# Altium PCB tinyfpga-raspi-romi-board.PcbDoc
Units mm, origin at the board's own origin, x right, y up, seen from the top; angles counter-clockwise.
Board outline 152.4 x 101.6 mm, 2 copper layers (F.Cu, B.Cu); 75 components, 75 nets, 287 pads, 4 vias.
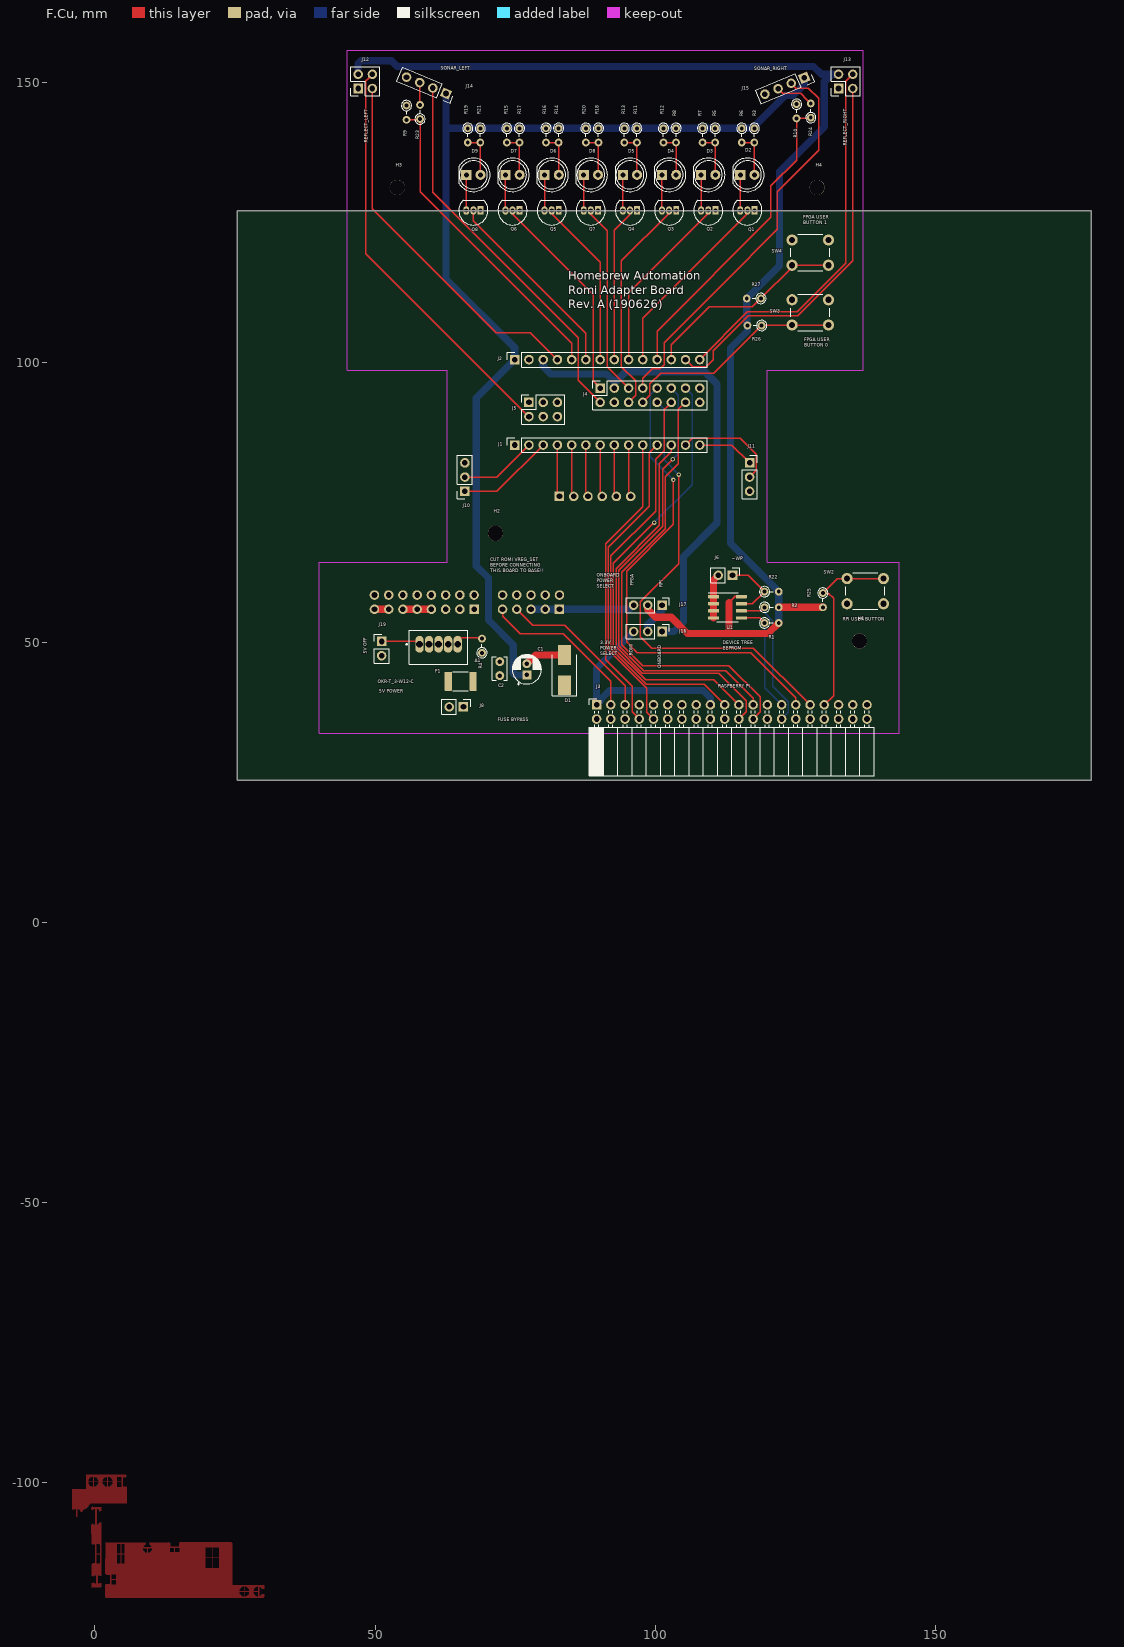
[diagram p0: F.Cu view]
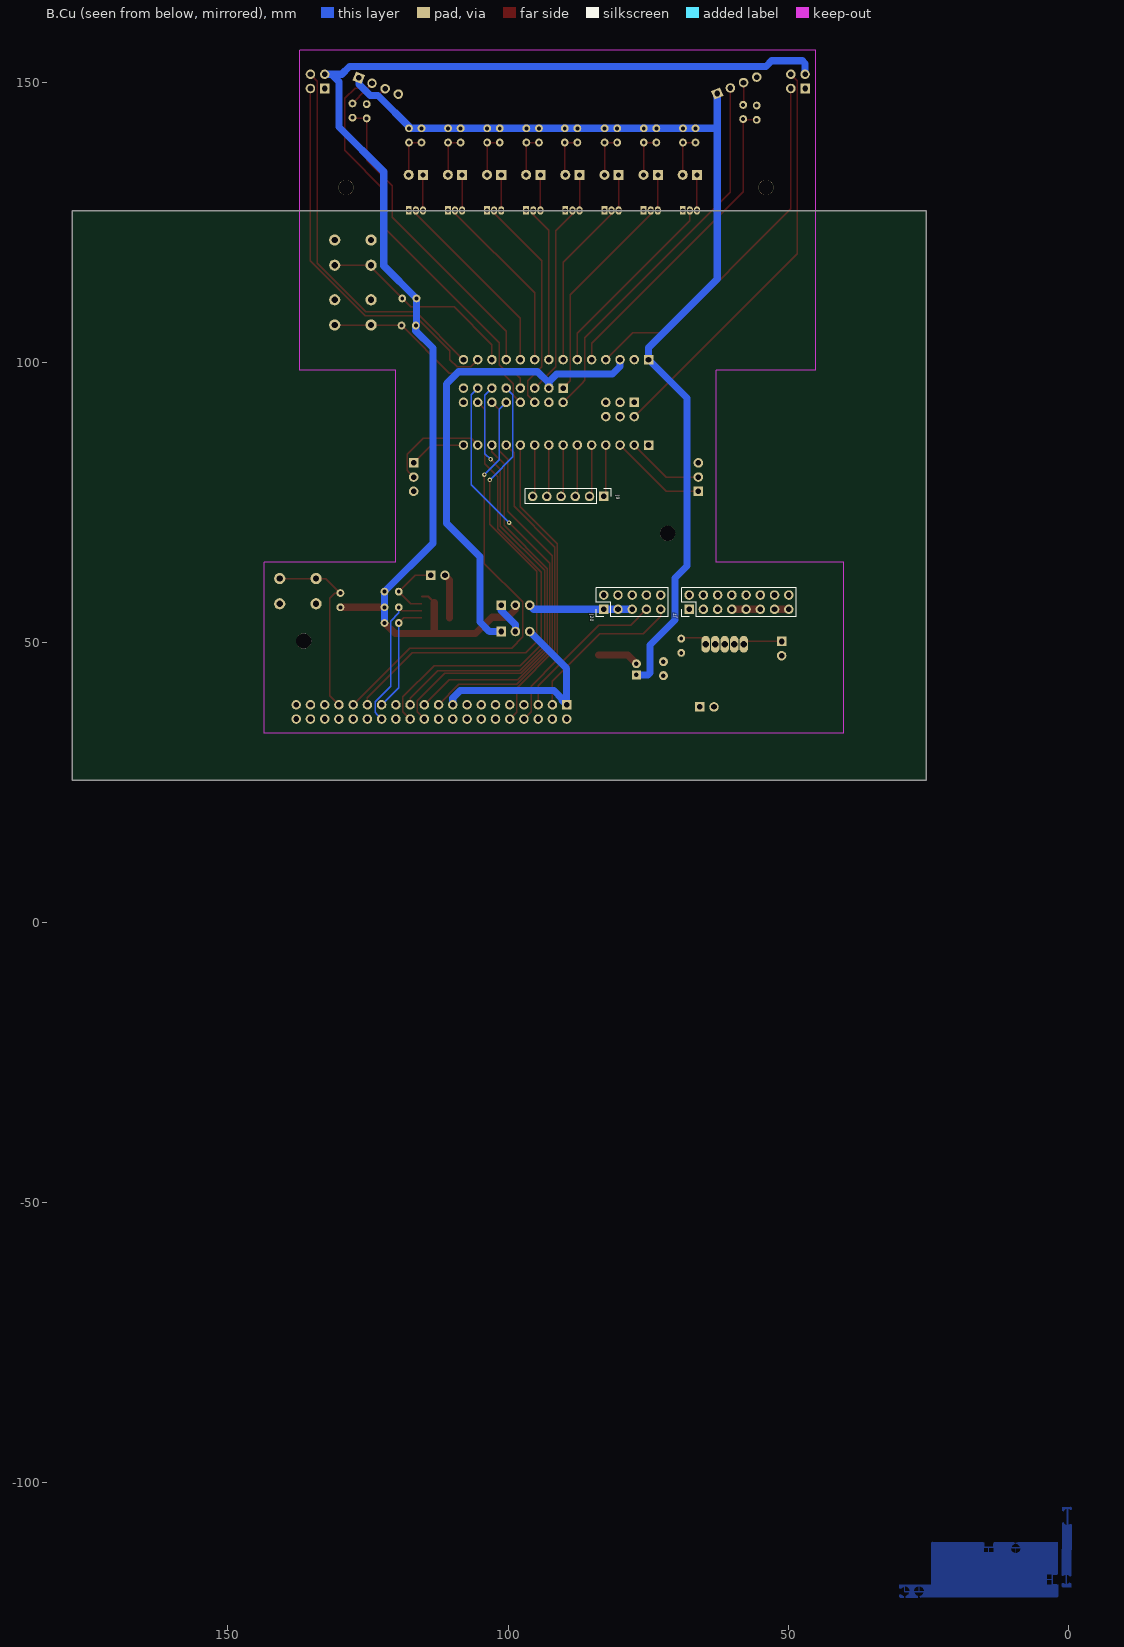
[diagram p1: B.Cu view, seen from below]

## Layer stack, top to bottom
F.Mask: solder mask 0.0102, Solder Resist, Dk 3.5
F.Cu: signal copper 0.0356
Dielectric 1: dielectric 0.32, FR-4, Dk 4.8
B.Cu: signal copper 0.0356
B.Mask: solder mask 0.0102, Solder Resist, Dk 3.5

## Board outline
25.4,25.4 177.8,25.4 177.8,127 25.4,127

## Design rules (kind name [scope] priority, off if disabled: settings)
RoutingVias [All] p1: holewidth=0.711 width=1.27 viastyle="Through Hole" minholewidth=0.711 minwidth=1.27 maxholewidth=0.711 maxwidth=1.27
SolderMaskExpansion [All] p1: expansion=0.102 istentingtop=FALSE
29 further rules are at their usual default settings.

## Classes and differential pairs
net class Power: +3V3 +5V +BATT FPGA_3.3V_OUT GND Net-(J16-Pad2) ROMI_3V3 RPI_3.3V_OUT VB VREG_OUT VRP
net class Default: FPGA_BTN0 FPGA_BTN1 FPGA_HBA_INT FPGA_LED0 FPGA_LED1 FPGA_LED2 FPGA_LED3 FPGA_LED4 FPGA_LED5 FPGA_LED6 FPGA_LED7 FPGA_SCK FPGA_SDI FPGA_SDO FPGA_SS FPGA_~HOLD FPGA_~WP Net-(A1-Pad1) Net-(A1-Pad5) Net-(D2-Pad1) Net-(D2-Pad2) Net-(D3-Pad1) Net-(D3-Pad2) Net-(D4-Pad1) Net-(D4-Pad2) Net-(D5-Pad1) Net-(D5-Pad2) Net-(D6-Pad1) Net-(D6-Pad2) Net-(D7-Pad1) Net-(D7-Pad2) Net-(D8-Pad1) Net-(D8-Pad2) Net-(D9-Pad1) Net-(D9-Pad2) Net-(J6-Pad1) Net-(J14-Pad3) Net-(J15-Pad3) QTRL_CTRL QTRL_OUT QTRR_CTRL QTRR_OUT ROMI_DIRL ROMI_DIRR ROMI_ENC_LA ROMI_ENC_LB ROMI_ENC_RA ROMI_ENC_RB ROMI_PG ROMI_PWML ROMI_PWMR ROMI_SHDN ROMI_~SLPL ROMI_~SLPR RPI_BTN0 RPI_ID_SC RPI_ID_SD RPI_RXD RPI_TXD SONL_ECHO SONL_TRIG SONR_ECHO SONR_TRIG

## Components (designator, comment, footprint, x,y, rotation, side; value= is the part's Value field where it differs from the comment)
A1 "OKR-T_3-W12-C" Murata_OKR-T-3_P73 61.341,49.657 r0 top
C1 "22uF" CP_Radial_D5.0mm_P2.00mm 77.089,44.196 r90 top
C2 "1uF" C_Rect_L4.0mm_W2.5mm_P2.50mm 72.263,44.069 r90 top
D1 "SMBJ5.0A" D_SMB_Handsoldering 83.82,45.052 r90 top
D2 "LED" LED_D5.0mm_Clear 115.181,133.434 r0 top
D3 "LED" LED_D5.0mm_Clear 108.196,133.434 r0 top
D4 "LED" LED_D5.0mm_Clear 101.211,133.434 r0 top
D5 "LED" LED_D5.0mm_Clear 94.226,133.434 r0 top
D6 "LED" LED_D5.0mm_Clear 80.256,133.434 r0 top
D7 "LED" LED_D5.0mm_Clear 73.271,133.434 r0 top
D8 "LED" LED_D5.0mm_Clear 87.241,133.434 r0 top
D9 "LED" LED_D5.0mm_Clear 66.286,133.434 r0 top
F1 "MF-MSMF250/16X-2" Fuse_1812_4532Metric_Pad1.30x3.40mm_HandSolder 65.278,43.053 r180 top
H1 "MountingHole" MountingHole_2.7mm_M2.5 136.443,50.242 r0 top
H2 "MountingHole" MountingHole_2.7mm_M2.5 71.501,69.469 r0 top
H3 "MountingHole" MountingHole_2.7mm_M2.5 53.975,131.191 r0 top
H4 "MountingHole" MountingHole_2.7mm_M2.5 128.905,131.191 r0 top
J1 "Conn_01x14_Female" PinSocket_1x14_P2.54mm_Vertical 74.93,85.217 r90 top
J2 "Conn_01x14_Female" PinSocket_1x14_P2.54mm_Vertical 74.93,100.457 r90 top
J3 "Raspberry_Pi_2_3" PinSocket_2x20_P2.54mm_Horizontal 89.535,38.862 r90 top
J4 "PinSocket_2x08_P2.54mm_Vertical" PinSocket_2x08_P2.54mm_Vertical 90.17,95.377 r90 top
J5 "PinSocket_2x03_P2.54mm_Vertical" PinSocket_2x03_P2.54mm_Vertical 77.47,92.837 r90 top
J6 "PinHeader_1x02_P2.54mm_Vertical" PinHeader_1x02_P2.54mm_Vertical 113.792,61.976 r270 top
J7 "PinHeader_2x08_P2.54mm_Vertical" PinHeader_2x08_P2.54mm_Vertical 67.678,55.908 r270 bottom
J8 "PinHeader_1x02_P2.54mm_Vertical" PinHeader_1x02_P2.54mm_Vertical 65.786,38.481 r270 top
J9 "PinHeader_1x06_P2.54mm_Vertical" PinHeader_1x06_P2.54mm_Vertical 82.918,76.048 r90 bottom
J10 "PinSocket_1x03_P2.54mm_Vertical" PinSocket_1x03_P2.54mm_Vertical 66.04,76.962 r180 top
J11 "PinSocket_1x03_P2.54mm_Vertical" PinSocket_1x03_P2.54mm_Vertical 116.84,82.042 r0 top
J12 "PinSocket_2x02_P2.54mm_Vertical" PinSocket_2x02_P2.54mm_Vertical 46.99,148.844 r180 top
J13 "PinSocket_2x02_P2.54mm_Vertical" PinSocket_2x02_P2.54mm_Vertical 132.715,148.844 r180 top
J14 "PinSocket_1x04_P2.54mm_Vertical" PinSocket_1x04_P2.54mm_Vertical 62.666,147.96 r247.5 top
J15 "PinSocket_1x04_P2.54mm_Vertical" PinSocket_1x04_P2.54mm_Vertical 126.619,150.749 r292.5 top
J16 "PinHeader_1x03_P2.54mm_Vertical" PinHeader_1x03_P2.54mm_Vertical 101.219,51.943 r270 top
J17 "PinHeader_1x03_P2.54mm_Vertical" PinHeader_1x03_P2.54mm_Vertical 101.219,56.642 r270 top
J19 "ON_OFF" PinHeader_1x02_P2.54mm_Vertical 51.181,50.165 r0 top
J20 "PinHeader_2x05_P2.54mm_Vertical" PinHeader_2x05_P2.54mm_Vertical 82.918,55.908 r270 bottom
Q1 "2N7000" TO-92_Inline 117.721,127.084 r180 top
Q2 "2N7000" TO-92_Inline 110.736,127.084 r180 top
Q3 "2N7000" TO-92_Inline 103.751,127.084 r180 top
Q4 "2N7000" TO-92_Inline 96.766,127.084 r180 top
Q5 "2N7000" TO-92_Inline 82.796,127.084 r180 top
Q6 "2N7000" TO-92_Inline 75.811,127.084 r180 top
Q7 "2N7000" TO-92_Inline 89.781,127.084 r180 top
Q8 "2N7000" TO-92_Inline 68.826,127.084 r180 top
R1 "3.9k" R_Axial_DIN0204_L3.6mm_D1.6mm_P2.54mm_Vertical 119.507,53.467 r0 top
R2 "3.9k" R_Axial_DIN0204_L3.6mm_D1.6mm_P2.54mm_Vertical 119.507,56.261 r0 top
R3 "268" R_Axial_DIN0204_L3.6mm_D1.6mm_P2.54mm_Vertical 117.686,141.74 r270 top
R4 "268" R_Axial_DIN0204_L3.6mm_D1.6mm_P2.54mm_Vertical 69.088,48.133 r90 top
R5 "268" R_Axial_DIN0204_L3.6mm_D1.6mm_P2.54mm_Vertical 110.701,141.74 r270 top
R6 "268" R_Axial_DIN0204_L3.6mm_D1.6mm_P2.54mm_Vertical 115.443,141.74 r270 top
R7 "268" R_Axial_DIN0204_L3.6mm_D1.6mm_P2.54mm_Vertical 108.458,141.74 r270 top
R8 "268" R_Axial_DIN0204_L3.6mm_D1.6mm_P2.54mm_Vertical 103.716,141.74 r270 top
R9 "3.9k" R_Axial_DIN0204_L3.6mm_D1.6mm_P2.54mm_Vertical 55.626,145.796 r270 top
R10 "3.9k" R_Axial_DIN0204_L3.6mm_D1.6mm_P2.54mm_Vertical 125.222,146.05 r270 top
R11 "268" R_Axial_DIN0204_L3.6mm_D1.6mm_P2.54mm_Vertical 96.731,141.74 r270 top
R12 "268" R_Axial_DIN0204_L3.6mm_D1.6mm_P2.54mm_Vertical 101.473,141.74 r270 top
R13 "268" R_Axial_DIN0204_L3.6mm_D1.6mm_P2.54mm_Vertical 94.488,141.74 r270 top
R14 "268" R_Axial_DIN0204_L3.6mm_D1.6mm_P2.54mm_Vertical 82.761,141.74 r270 top
R15 "268" R_Axial_DIN0204_L3.6mm_D1.6mm_P2.54mm_Vertical 73.533,141.74 r270 top
R16 "268" R_Axial_DIN0204_L3.6mm_D1.6mm_P2.54mm_Vertical 80.518,141.74 r270 top
R17 "268" R_Axial_DIN0204_L3.6mm_D1.6mm_P2.54mm_Vertical 75.776,141.74 r270 top
R18 "268" R_Axial_DIN0204_L3.6mm_D1.6mm_P2.54mm_Vertical 89.873,141.74 r270 top
R19 "268" R_Axial_DIN0204_L3.6mm_D1.6mm_P2.54mm_Vertical 66.548,141.74 r270 top
R20 "268" R_Axial_DIN0204_L3.6mm_D1.6mm_P2.54mm_Vertical 87.63,141.74 r270 top
R21 "268" R_Axial_DIN0204_L3.6mm_D1.6mm_P2.54mm_Vertical 68.791,141.74 r270 top
R22 "3.9k" R_Axial_DIN0204_L3.6mm_D1.6mm_P2.54mm_Vertical 119.507,59.055 r0 top
R23 "3.9k" R_Axial_DIN0204_L3.6mm_D1.6mm_P2.54mm_Vertical 58.039,143.383 r90 top
R24 "3.9k" R_Axial_DIN0204_L3.6mm_D1.6mm_P2.54mm_Vertical 127.762,143.637 r90 top
R25 "3.9k" R_Axial_DIN0204_L3.6mm_D1.6mm_P2.54mm_Vertical 129.921,58.801 r270 top
R26 "3.9k" R_Axial_DIN0204_L3.6mm_D1.6mm_P2.54mm_Vertical 118.999,106.553 r180 top
R27 "3.9k" R_Axial_DIN0204_L3.6mm_D1.6mm_P2.54mm_Vertical 118.872,111.379 r180 top
SW2 "SW_Push" SW_PUSH_6mm_H5mm 140.747,56.884 r180 top
SW3 "SW_Push" SW_PUSH_6mm_H5mm 124.429,111.137 r0 top
SW4 "SW_Push" SW_PUSH_6mm_H5mm 124.429,121.805 r0 top
U1 "CAT24C128" SOIC-8_3.9x4.9mm_P1.27mm 112.903,56.261 r0 top

## Footprints (in the part's own frame and the unit in brackets; to place one, negate y for a bottom-side part, rotate by r counter-clockwise, add the part's x,y. Pads: shape width x height; smd on the part's side, far side on the other; paste and mask are expansions set on the pad)
C_Rect_L4.0mm_W2.5mm_P2.50mm [mm]
  round 1.6 hole 0.8 paste-1.6 mask+0.051: 1(0,0) 2(2.5,0)
  silkscreen extent -0.87,-1.37 3.37,1.37
CP_Radial_D5.0mm_P2.00mm [mm]
  rect 1.6x1.6 hole 0.8 paste-1.6 mask+0.051: 1(0,0)
  round 1.6 hole 0.8 paste-1.6 mask+0.051: 2(2,0)
  silkscreen extent -1.8,-2.62 3.62,2.62
D_SMB_Handsoldering [mm]
  rect 3.5x2.3 smd mask+0.051: 1(-2.7,0) 2(2.7,0)
  silkscreen extent -4.6,-2.15 2.7,2.15
Fuse_1812_4532Metric_Pad1.30x3.40mm_HandSolder [mm]
  rrect19% 1.3x3.4 smd mask+0.051: 1(-2.225,0) 2(2.225,0)
  silkscreen extent -1.39,-1.71 1.39,1.71
LED_D5.0mm_Clear [mm]
  rect 1.8x1.8 hole 0.9 paste-1.8 mask+0.051: 1(0,0)
  round 1.8 hole 0.9 paste-1.8 mask+0.051: 2(2.54,0)
  silkscreen extent -1.29,-2.99 4.26,2.99
MountingHole_2.7mm_M2.5 [mm]
  round 2.7 hole 2.7 paste-2.7 mask+0.051: 1(0,0)
Murata_OKR-T-3_P73 [mm]
  rrect100% 1.5x3 hole 1.19 paste-3 mask+0.051: 1(-3.4,0) 2(-1.7,0) 3(0,0) 4(1.7,0) 5(3.4,0)
  silkscreen extent -5.82,-3.56 5.2,2.54
PinHeader_1x02_P2.54mm_Vertical [mm]
  rect 1.7x1.7 hole 1 paste-1.7 mask+0.051: 1(0,0)
  rrect100% 1.7x1.7 hole 1 paste-1.7 mask+0.051: 2(0,-2.54)
  silkscreen extent -1.33,-3.87 1.33,1.33
PinHeader_1x03_P2.54mm_Vertical [mm]
  rect 1.7x1.7 hole 1 paste-1.7 mask+0.051: 1(0,0)
  rrect100% 1.7x1.7 hole 1 paste-1.7 mask+0.051: 2(0,-2.54) 3(0,-5.08)
  silkscreen extent -1.33,-6.41 1.33,1.33
PinHeader_1x06_P2.54mm_Vertical [mm]
  rect 1.7x1.7 hole 1 paste-1.7 mask+0.051: 1(0,0)
  rrect100% 1.7x1.7 hole 1 paste-1.7 mask+0.051: 2(0,2.54) 3(0,5.08) 4(0,7.62) 5(0,10.16) 6(0,12.7)
  silkscreen extent -1.33,-1.33 1.33,14.03
PinHeader_2x05_P2.54mm_Vertical [mm]
  rect 1.7x1.7 hole 1 paste-1.7 mask+0.051: 1(0,0)
  rrect100% 1.7x1.7 hole 1 paste-1.7 mask+0.051: 2(-2.54,0) 3(0,2.54) 4(-2.54,2.54) 5(0,5.08) 6(-2.54,5.08) 7(0,7.62) 8(-2.54,7.62) 9(0,10.16) 10(-2.54,10.16)
  silkscreen extent -3.87,-1.33 1.33,11.49
PinHeader_2x08_P2.54mm_Vertical [mm]
  rect 1.7x1.7 hole 1 paste-1.7 mask+0.051: 1(0,0)
  rrect100% 1.7x1.7 hole 1 paste-1.7 mask+0.051: 2(-2.54,0) 3(0,2.54) 4(-2.54,2.54) 5(0,5.08) 6(-2.54,5.08) 7(0,7.62) 8(-2.54,7.62) 9(0,10.16) 10(-2.54,10.16) 11(0,12.7) 12(-2.54,12.7) 13(0,15.24) 14(-2.54,15.24) 15(0,17.78) 16(-2.54,17.78)
  silkscreen extent -3.87,-1.33 1.33,19.11
PinSocket_1x03_P2.54mm_Vertical [mm]
  rect 1.7x1.7 hole 1 paste-1.7 mask+0.051: 1(0,0)
  rrect100% 1.7x1.7 hole 1 paste-1.7 mask+0.051: 2(0,-2.54) 3(0,-5.08)
  silkscreen extent -1.33,-6.41 1.33,1.33
PinSocket_1x04_P2.54mm_Vertical [mm]
  rect 1.7x1.7 hole 1 paste-1.7 mask+0.051: 1(0,0)
  rrect100% 1.7x1.7 hole 1 paste-1.7 mask+0.051: 2(0,-2.54) 3(0,-5.08) 4(0,-7.62)
  silkscreen extent -1.33,-8.95 1.33,1.33
PinSocket_1x14_P2.54mm_Vertical [mm]
  rect 1.7x1.7 hole 1 paste-1.7 mask+0.051: 1(0,0)
  rrect100% 1.7x1.7 hole 1 paste-1.7 mask+0.051: 2(0,-2.54) 3(0,-5.08) 4(0,-7.62) 5(0,-10.16) 6(0,-12.7) 7(0,-15.24) 8(0,-17.78) 9(0,-20.32) 10(0,-22.86) 11(0,-25.4) 12(0,-27.94) 13(0,-30.48) 14(0,-33.02)
  silkscreen extent -1.33,-34.35 1.33,1.33
PinSocket_2x02_P2.54mm_Vertical [mm]
  rect 1.7x1.7 hole 1 paste-1.7 mask+0.051: 1(0,0)
  rrect100% 1.7x1.7 hole 1 paste-1.7 mask+0.051: 2(-2.54,0) 3(0,-2.54) 4(-2.54,-2.54)
  silkscreen extent -3.87,-3.87 1.33,1.33
PinSocket_2x03_P2.54mm_Vertical [mm]
  rect 1.7x1.7 hole 1 paste-1.7 mask+0.051: 1(0,0)
  rrect100% 1.7x1.7 hole 1 paste-1.7 mask+0.051: 2(-2.54,0) 3(0,-2.54) 4(-2.54,-2.54) 5(0,-5.08) 6(-2.54,-5.08)
  silkscreen extent -3.87,-6.41 1.33,1.33
PinSocket_2x08_P2.54mm_Vertical [mm]
  rect 1.7x1.7 hole 1 paste-1.7 mask+0.051: 1(0,0)
  rrect100% 1.7x1.7 hole 1 paste-1.7 mask+0.051: 2(-2.54,0) 3(0,-2.54) 4(-2.54,-2.54) 5(0,-5.08) 6(-2.54,-5.08) 7(0,-7.62) 8(-2.54,-7.62) 9(0,-10.16) 10(-2.54,-10.16) 11(0,-12.7) 12(-2.54,-12.7) 13(0,-15.24) 14(-2.54,-15.24) 15(0,-17.78) 16(-2.54,-17.78)
  silkscreen extent -3.87,-19.11 1.33,1.33
PinSocket_2x20_P2.54mm_Horizontal [mm]
  rect 1.7x1.7 hole 1 paste-1.7 mask+0.051: 1(0,0)
  rrect100% 1.7x1.7 hole 1 paste-1.7 mask+0.051: 2(-2.54,0) 3(0,-2.54) 4(-2.54,-2.54) 5(0,-5.08) 6(-2.54,-5.08) 7(0,-7.62) 8(-2.54,-7.62) 9(0,-10.16) 10(-2.54,-10.16) 11(0,-12.7) 12(-2.54,-12.7) 13(0,-15.24) 14(-2.54,-15.24) 15(0,-17.78) 16(-2.54,-17.78) 17(0,-20.32) 18(-2.54,-20.32) 19(0,-22.86) 20(-2.54,-22.86) 21(0,-25.4) 22(-2.54,-25.4) 23(0,-27.94) 24(-2.54,-27.94) 25(0,-30.48) 26(-2.54,-30.48) 27(0,-33.02) 28(-2.54,-33.02) 29(0,-35.56) 30(-2.54,-35.56) 31(0,-38.1) 32(-2.54,-38.1) 33(0,-40.64) 34(-2.54,-40.64) 35(0,-43.18) 36(-2.54,-43.18) 37(0,-45.72) 38(-2.54,-45.72) 39(0,-48.26) 40(-2.54,-48.26)
  silkscreen extent -12.63,-49.59 1.11,1.33
R_Axial_DIN0204_L3.6mm_D1.6mm_P2.54mm_Vertical [mm]
  round 1.4 hole 0.7 paste-1.4 mask+0.051: 1(0,0)
  rrect100% 1.4x1.4 hole 0.7 paste-1.4 mask+0.051: 2(2.54,0)
  silkscreen extent -0.92,-0.92 1.54,0.92
SOIC-8_3.9x4.9mm_P1.27mm [mm]
  rrect25% 1.95x0.6 smd mask+0.051: 1(-2.475,1.905) 2(-2.475,0.635) 3(-2.475,-0.635) 4(-2.475,-1.905) 5(2.475,-1.905) 6(2.475,-0.635) 7(2.475,0.635) 8(2.475,1.905)
  silkscreen extent -3.45,-2.56 1.95,2.56
SW_PUSH_6mm_H5mm [mm]
  round 2 hole 1.1 paste-2 mask+0.051: 1(0,0) 1(6.5,0) 2(0,-4.5) 2(6.5,-4.5)
  silkscreen extent -0.25,-5.5 6.75,1
TO-92_Inline [mm]
  rect 1.05x1.5 hole 0.75 paste-1.5 mask+0.051: 1(0,0)
  rrect100% 1.05x1.5 hole 0.75 paste-1.5 mask+0.051: 2(1.27,0) 3(2.54,0)
  silkscreen extent -1.33,-1.85 3.87,2.6

## Part data
A1: library part Murata_OKR-T-3_P73, "Murata OKR-T/3 Series - P73 Footprint"
C1: library part CP_Radial_D5.0mm_P2.00mm, "CP, Radial series, Radial, pin pitch=2.00mm, , diameter=5mm, Electrolytic Capacitor"
C2: library part C_Rect_L4.0mm_W2.5mm_P2.50mm, "C, Rect series, Radial, pin pitch=2.50mm, , length*width=4*2.5mm^2, Capacitor"
D1: library part D_SMB_Handsoldering, "Diode SMB (DO-214AA) Handsoldering"
D2 D3 D4 D5 D6 D7 D8 D9: library part LED_D5.0mm_Clear, "LED, diameter 5.0mm, 2 pins, http://cdn-reichelt.de/documents/datenblatt/A500/LL-504BC2E-009.pdf"
F1: library part Fuse_1812_4532Metric_Pad1.30x3.40mm_HandSolder, "Fuse SMD 1812 (4532 Metric), square (rectangular) end terminal, IPC_7351 nominal with elongated pad for handsoldering. (Body size source: https://www.nikhef.nl/pub/departments/mt/projects/detectorR_D/dtddice/ERJ2G.pdf), generated with kicad-footprint-generator"
H1 H2 H3 H4: library part MountingHole_2.7mm_M2.5, "Mounting Hole 2.7mm, no annular, M2.5"
J1 J2: library part PinSocket_1x14_P2.54mm_Vertical, "Through hole straight socket strip, 1x14, 2.54mm pitch, single row (from Kicad 4.0.7), script generated"
J3: library part PinSocket_2x20_P2.54mm_Horizontal, "Through hole angled socket strip, 2x20, 2.54mm pitch, 8.51mm socket length, double cols (from Kicad 4.0.7), script generated"
J4: "Through hole straight socket strip, 2x08, 2.54mm pitch, double cols (from Kicad 4.0.7), script generated"
J5: "Through hole straight socket strip, 2x03, 2.54mm pitch, double cols (from Kicad 4.0.7), script generated"
J6 J8: "Through hole straight pin header, 1x02, 2.54mm pitch, single row"
J7: "Through hole straight pin header, 2x08, 2.54mm pitch, double rows"
J9: "Through hole straight pin header, 1x06, 2.54mm pitch, single row"
J10 J11: "Through hole straight socket strip, 1x03, 2.54mm pitch, single row (from Kicad 4.0.7), script generated"
J12 J13: "Through hole straight socket strip, 2x02, 2.54mm pitch, double cols (from Kicad 4.0.7), script generated"
J14 J15: "Through hole straight socket strip, 1x04, 2.54mm pitch, single row (from Kicad 4.0.7), script generated"
J16 J17: "Through hole straight pin header, 1x03, 2.54mm pitch, single row"
J19: library part PinHeader_1x02_P2.54mm_Vertical, "Through hole straight pin header, 1x02, 2.54mm pitch, single row"
J20: "Through hole straight pin header, 2x05, 2.54mm pitch, double rows"
Q1 Q2 Q3 Q4 Q5 Q6 Q7 Q8: library part TO-92_Inline, "TO-92 leads in-line, narrow, oval pads, drill 0.75mm (see NXP sot054_po.pdf)"
R1 R2 R3 R4 R5 R6 R7 R8 R9 R10 R11 R12 R13 R14 R15 R16 R17 R18 R19 R20 R21 R22 R23 R24 R25 R26 R27: library part R_Axial_DIN0204_L3.6mm_D1.6mm_P2.54mm_Vertical, "Resistor, Axial_DIN0204 series, Axial, Vertical, pin pitch=2.54mm, 0.167W, length*diameter=3.6*1.6mm^2, http://cdn-reichelt.de/documents/datenblatt/B400/1_4W%23YAG.pdf"
SW2 SW3 SW4: library part SW_PUSH_6mm_H5mm, "tactile push button, 6x6mm e.g. PHAP33xx series, height=5mm"
U1: library part SOIC-8_3.9x4.9mm_P1.27mm, "SOIC, 8 Pin (JEDEC MS-012AA, https://www.analog.com/media/en/package-pcb-resources/package/pkg_pdf/soic_narrow-r/r_8.pdf), generated with kicad-footprint-generator ipc_gullwing_generator.py"

## Via types
v1: diameter 0.8, hole 0.4, F.Cu to B.Cu, tented both sides, 4 vias

## Nets (pads, with @x,y where several pads share a name; then routed paths per layer and width w, separated by ;. In a path a pad name is that pad's centre, name@x,y a point inside that pad or via, vN(x,y) a via of type N, cw(c..) or ccw(c..) an arc to the next point about the centre after c; other vN are vias at no path point)
+3V3: 
+5V: 
+BATT: 
FPGA_3.3V_OUT: 
FPGA_BTN0: 
FPGA_BTN1: 
FPGA_HBA_INT: 
FPGA_LED0: 
FPGA_LED1: 
FPGA_LED2: 
FPGA_LED3: 
FPGA_LED4: 
FPGA_LED5: 
FPGA_LED6: 
FPGA_LED7: 
FPGA_SCK: 
FPGA_SDI: 
FPGA_SDO: 
FPGA_SS: 
FPGA_~HOLD: 
FPGA_~WP: 
GND: 
Net-(A1-Pad1): 
Net-(A1-Pad5): 
Net-(D2-Pad1): 
Net-(D2-Pad2): 
Net-(D3-Pad1): 
Net-(D3-Pad2): 
Net-(D4-Pad1): 
Net-(D4-Pad2): 
Net-(D5-Pad1): 
Net-(D5-Pad2): 
Net-(D6-Pad1): 
Net-(D6-Pad2): 
Net-(D7-Pad1): 
Net-(D7-Pad2): 
Net-(D8-Pad1): 
Net-(D8-Pad2): 
Net-(D9-Pad1): 
Net-(D9-Pad2): 
Net-(J6-Pad1): 
Net-(J14-Pad3): 
Net-(J15-Pad3): 
Net-(J16-Pad2): 
QTRL_CTRL: 
QTRL_OUT: 
QTRR_CTRL: 
QTRR_OUT: 
ROMI_3V3: 
ROMI_DIRL: 
ROMI_DIRR: 
ROMI_ENC_LA: 
ROMI_ENC_LB: 
ROMI_ENC_RA: 
ROMI_ENC_RB: 
ROMI_PG: 
ROMI_PWML: 
ROMI_PWMR: 
ROMI_SHDN: 
ROMI_~SLPL: 
ROMI_~SLPR: 
RPI_3.3V_OUT: 
RPI_BTN0: 
RPI_ID_SC: 
RPI_ID_SD: 
RPI_RXD: 
RPI_TXD: 
SONL_ECHO: 
SONL_TRIG: 
SONR_ECHO: 
SONR_TRIG: 
VB: 
VREG_OUT: 
VRP: 
"": 
pads on no net: A1.1 A1.2 A1.3 A1.4 A1.5 C1.1 C1.2 C2.1 C2.2 D1.1 D1.2 D2.1 D2.2 D3.1 D3.2 D4.1 D4.2 D5.1 D5.2 D6.1 D6.2 D7.1 D7.2 D8.1 D8.2 D9.1 D9.2 F1.1 F1.2 H1.1 H2.1 H3.1 H4.1 J1.1 J1.2 J1.3 J1.4 J1.5 J1.6 J1.7 J1.8 J1.9 J1.10 J1.11 J1.12 J1.13 J1.14 J2.1 J2.2 J2.3 J2.4 J2.5 J2.6 J2.7 J2.8 J2.9 J2.10 J2.11 J2.12 J2.13 J2.14 J3.1 J3.2 J3.3 J3.4 J3.5 J3.6 J3.7 J3.8 J3.9 J3.10 J3.11 J3.12 J3.13 J3.14 J3.15 J3.16 J3.17 J3.18 J3.19 J3.20 J3.21 J3.22 J3.23 J3.24 J3.25 J3.26 J3.27 J3.28 J3.29 J3.30 J3.31 J3.32 J3.33 J3.34 J3.35 J3.36 J3.37 J3.38 J3.39 J3.40 J4.1 J4.2 J4.3 J4.4 J4.5 J4.6 J4.7 J4.8 J4.9 J4.10 J4.11 J4.12 J4.13 J4.14 J4.15 J4.16 J5.1 J5.2 J5.3 J5.4 J5.5 J5.6 J6.1 J6.2 J7.1 J7.2 J7.3 J7.4 J7.5 J7.6 J7.7 J7.8 J7.9 J7.10 J7.11 J7.12 J7.13 J7.14 J7.15 J7.16 J8.1 J8.2 J9.1 J9.2 J9.3 J9.4 J9.5 J9.6 J10.1 J10.2 J10.3 J11.1 J11.2 J11.3 J12.1 J12.2 J12.3 J12.4 J13.1 J13.2 J13.3 J13.4 J14.1 J14.2 J14.3 J14.4 J15.1 J15.2 J15.3 J15.4 J16.1 J16.2 J16.3 J17.1 J17.2 J17.3 J19.1 J19.2 J20.1 J20.2 J20.3 J20.4 J20.5 J20.6 J20.7 J20.8 J20.9 J20.10 Q1.1 Q1.2 Q1.3 Q2.1 Q2.2 Q2.3 Q3.1 Q3.2 Q3.3 Q4.1 Q4.2 Q4.3 Q5.1 Q5.2 Q5.3 Q6.1 Q6.2 Q6.3 Q7.1 Q7.2 Q7.3 Q8.1 Q8.2 Q8.3 R1.1 R1.2 R2.1 R2.2 R3.1 R3.2 R4.1 R4.2 R5.1 R5.2 R6.1 R6.2 R7.1 R7.2 R8.1 R8.2 R9.1 R9.2 R10.1 R10.2 R11.1 R11.2 R12.1 R12.2 R13.1 R13.2 R14.1 R14.2 R15.1 R15.2 R16.1 R16.2 R17.1 R17.2 R18.1 R18.2 R19.1 R19.2 R20.1 R20.2 R21.1 R21.2 R22.1 R22.2 R23.1 R23.2 R24.1 R24.2 R25.1 R25.2 R26.1 R26.2 R27.1 R27.2 SW2.1 SW2.2 SW3.1 SW3.2 SW4.1 SW4.2 U1.1 U1.2 U1.3 U1.4 U1.5 U1.6 U1.7 U1.8
copper on no net: | length 2564.7
  F.Cu w0.254: 49.53,148.844 49.53,127.381 71.628,105.283 77.724,105.283 82.55,100.457 ; 49.53,151.384 48.68,150.534 48.35,150.204 48.35,147.103 48.387,147.066 48.387,119.38 77.47,90.297 ; 51.181,50.165 57.433,50.165 57.941,49.657 ; 55.499,143.256 57.912,143.256 58.039,143.383 58.039,130.429 85.09,103.378 85.09,100.457 ; 57.973,149.904 57.973,145.989 58.039,145.923 ; 60.319,148.932 60.319,130.308 86.27,104.357 86.27,96.737 86.868,96.139 90.17,92.837 ; 64.741,49.657 64.741,50.407 65.134,50.8 68.961,50.8 69.088,50.673 ; 66.04,76.962 71.755,76.962 80.01,85.217 ; 66.04,79.502 71.755,79.502 77.47,85.217 ; 66.286,127.084 66.286,133.434 ; 66.548,139.2 68.791,139.2 68.791,133.469 68.826,133.434 ; 67.556,127.084 67.556,125.23 87.63,105.156 87.63,100.457 ; 72.758,55.908 72.758,54.706 75.902,51.562 83.596,51.562 92.075,43.083 92.075,40.064 92.075,38.862 ; 73.271,127.084 73.271,133.434 ; 73.533,139.2 75.776,139.2 75.776,133.469 75.811,133.434 ; 74.541,127.084 74.541,126.373 88.9,112.014 88.9,98.044 ; 75.298,55.908 78.12,53.086 83.82,53.086 94.615,42.291 94.615,38.862 ; 80.256,127.084 80.256,133.434 ; 80.518,139.2 82.761,139.2 82.761,133.469 82.796,133.434 ; 81.526,127.084 81.526,126.5 90.17,117.856 90.17,100.457 ; 82.55,85.217 82.55,76.416 82.918,76.048 ; 85.09,85.217 85.09,76.416 85.458,76.048 ; 87.241,127.084 87.241,133.434 ; 87.63,85.217 87.63,76.416 87.998,76.048 ; 87.63,139.2 89.873,139.2 89.873,133.525 89.781,133.434 ; 88.511,127.084 88.511,126.373 91.44,123.444 91.44,99.187 92.964,97.663 95.25,95.377 ; 88.9,97.917 88.9,98.044 ; 90.17,85.217 90.17,76.416 90.538,76.048 ; 90.17,95.377 88.9,96.647 88.9,98.044 ; 92.71,85.217 92.71,76.416 93.078,76.048 ; 92.71,100.457 92.71,123.571 95.496,126.357 95.496,127.084 ; 94.226,127.084 94.226,133.434 ; 94.488,139.2 96.731,139.2 96.731,133.469 96.766,133.434 ; 95.25,85.217 95.25,76.416 95.618,76.048 ; 95.25,92.837 96.52,94.107 96.52,94.234 96.52,96.647 93.98,99.187 93.98,118.11 102.481,126.611 102.481,127.084 ; 95.25,100.457 95.25,112.395 109.466,126.611 109.466,127.084 ; 97.155,36.322 95.885,37.592 95.885,42.164 91.186,46.863 91.186,67.564 97.79,74.168 97.79,84.015 97.79,85.217 ; 97.79,92.837 99.06,94.107 99.06,96.139 100.965,98.044 110.49,98.044 118.999,106.553 124.346,106.553 124.429,106.637 ; 97.79,95.377 97.79,97.155 99.441,98.806 100.838,98.806 101.6,99.568 101.6,103.505 112.204,114.109 ; 97.79,100.457 97.79,107.823 116.451,126.484 116.451,127.084 ; 99.695,36.322 98.464,37.553 98.464,41.825 91.643,48.645 91.643,67.005 98.933,74.295 98.933,83.82 99.48,84.367 100.33,85.217 ; v1(99.822,71.374) 99.422,70.974 92.558,64.11 92.558,49.024 98.275,43.307 110.49,43.307 114.935,38.862 ; 100.33,100.457 100.33,105.537 120.65,125.857 120.65,131.445 125.222,136.017 125.222,143.51 127.635,143.51 127.762,143.637 ; 101.211,127.084 101.211,133.434 ; 101.473,139.2 103.716,139.2 103.716,133.469 103.751,133.434 ; 102.87,85.217 102.87,84.015 100.711,81.856 100.711,70.878 93.015,63.181 93.015,49.214 97.728,44.501 111.328,44.501 116.205,39.624 116.205,37.592 114.935,36.322 ; 102.87,92.837 102.02,91.987 101.6,91.567 101.6,84.201 100.076,82.677 100.076,73.406 92.1,65.43 92.1,48.835 98.435,42.501 108.756,42.501 112.395,38.862 ; 102.87,100.457 102.87,103.124 109.601,109.855 117.348,109.855 118.872,111.379 124.429,116.936 124.429,117.305 130.929,117.305 131.191,117.043 ; v1(103.124,82.677) 101.346,80.899 101.346,70.739 93.472,62.865 93.472,49.403 97.917,44.958 112.581,44.958 117.475,40.064 117.475,38.862 ; v1(103.259,78.986) 103.259,78.42 103.259,71.094 94.894,62.729 94.894,50.128 96.839,48.184 117.055,48.184 125.095,40.144 125.095,38.862 ; v1(104.212,79.938) 104.212,64.075 97.37,57.233 97.37,50.966 99.353,48.983 117.514,48.983 127.635,38.862 ; 105.41,85.217 106.59,86.397 115.152,86.397 118.02,83.529 118.02,80.682 117.69,80.352 116.84,79.502 ; 105.41,92.837 104.14,91.567 104.14,81.903 101.803,79.567 101.803,70.296 94.056,62.549 94.056,49.592 97.802,45.847 113.157,45.847 118.745,40.259 118.745,37.592 118.325,37.172 117.475,36.322 ; 105.41,100.457 106.68,99.187 109.093,99.187 110.363,100.457 110.363,102.057 116.637,108.331 125.476,108.331 135.255,118.11 135.255,147.642 135.255,148.844 ; 107.95,85.217 113.665,85.217 116.84,82.042 ; 107.95,100.457 116.459,108.966 125.349,108.966 134.024,117.641 134.024,150.153 135.255,151.384 ; 108.196,127.084 108.196,132.28 108.196,133.434 ; 108.458,139.2 110.701,139.2 110.701,133.469 110.736,133.434 ; 112.045,113.919 112.045,113.95 112.204,114.109 ; 113.792,61.976 116.586,61.976 119.507,59.055 117.348,56.896 115.378,56.896 ; 115.181,127.084 115.181,133.434 ; 115.378,54.356 118.618,54.356 119.507,53.467 ; 115.378,55.626 118.872,55.626 119.507,56.261 ; 115.443,139.2 117.686,139.2 117.686,133.469 117.721,133.434 ; 121.926,148.805 122.776,147.955 125.984,147.955 127.062,146.877 127.762,146.177 ; 124.272,149.777 125.122,148.927 127.298,148.927 129.159,147.066 129.159,137.795 121.793,130.429 121.793,123.698 112.204,114.109 ; 124.683,106.637 131.183,106.637 ; 130.175,38.862 131.826,40.513 131.826,57.886 130.911,58.801 129.921,58.801 132.504,61.384 134.247,61.384 140.747,61.384
  F.Cu w0.381: 113.157,57.119 114.204,58.166 115.378,58.166
  F.Cu w1.27: 49.898,55.908 52.438,55.908 ; 54.978,55.908 60.058,55.908 ; 77.089,46.196 78.645,47.752 83.82,47.752 ; 98.679,56.642 98.679,55.882 100.078,54.483 102.87,54.483 105.791,51.562 113.157,51.562 ; 110.428,54.356 110.428,61.152 111.252,61.976 ; 113.157,57.119 113.157,51.562 ; 122.047,53.467 120.142,51.562 113.157,51.562 ; 122.047,56.261 129.921,56.261
  B.Cu w0.254: v1(99.822,71.374) 100.222,71.774 105.791,77.343 106.59,78.142 106.59,94.197 105.41,95.377 ; 100.33,92.837 101.6,91.567 101.6,82.55 v1(104.212,79.938) ; 100.33,95.377 99.15,94.197 99.15,83.095 102.859,79.386 v1(103.259,78.986) ; 102.87,95.377 104.14,94.107 104.14,83.693 v1(103.124,82.677) ; 119.507,53.467 119.507,41.91 122.555,38.862 ; 119.507,56.261 119.507,55.271 120.966,53.812 120.966,42.198 123.735,39.428 123.735,37.502 123.405,37.172 122.555,36.322
  B.Cu w1.27: 46.99,151.384 46.99,153.289 47.498,153.797 52.959,153.797 53.975,152.781 128.27,152.781 129.667,151.384 131.513,151.384 ; 77.089,44.196 75.019,44.196 74.676,44.539 74.676,49.53 70.231,53.975 70.231,61.468 68.072,63.627 68.072,93.599 74.93,100.457 74.93,102.577 62.666,114.841 62.666,146.94 62.666,147.96 62.666,141.74 66.548,141.74 117.686,141.74 ; 77.838,55.908 95.405,55.908 96.139,56.642 ; 80.01,100.457 80.01,99.255 81.348,97.917 91.313,97.917 92.71,96.52 92.71,95.377 92.71,96.266 94.742,98.298 108.839,98.298 110.998,96.139 110.998,71.247 105.029,65.278 105.029,53.633 103.339,51.943 101.219,51.943 ; 96.139,51.943 89.535,45.339 89.535,38.862 90.336,39.663 90.336,39.917 91.821,41.402 108.517,41.402 109.855,40.064 109.855,38.862 ; 98.679,51.943 98.679,53.145 101.219,55.685 101.219,56.642 ; 110.701,141.74 115.443,141.74 116.433,141.74 117.366,141.74 123.201,147.574 124.587,147.574 126.619,149.606 126.619,150.749 ; 122.047,54.457 122.047,53.467 122.047,54.457 ; 122.047,54.457 122.047,56.261 ; 122.047,54.457 122.047,56.261 ; 122.047,56.261 122.047,59.055 ; 122.047,56.261 122.047,59.055 ; 122.047,59.055 113.411,67.691 113.411,102.515 116.459,105.563 116.459,106.553 116.332,106.68 116.332,111.379 122.174,117.221 122.174,133.985 130.175,141.986 130.175,150.046 131.513,151.384 ; 131.513,151.384 132.715,151.384 131.513,151.384

## Polygon pours and split planes (outlines as drawn)
+BATT on F.Cu "F.Cu-+BATT" (solid, remove dead copper, pour order 1): -1.524,-98.552 5.715,-98.552 5.715,-103.632 -0.762,-103.632 -4.064,-107.569 -4.064,-101.092 -1.524,-101.092
+5V on F.Cu "F.Cu-+5V" (solid, remove dead copper, pour order 1): 1.937,-110.68 1.873,-120.459 30.226,-120.523 30.226,-118.237 24.511,-118.237 24.511,-110.576
VREG_OUT on F.Cu "F.Cu-/VREG_OUT" (solid, remove dead copper, pour order 1): -0.635,-104.267 -0.508,-118.618 1.175,-118.618 1.111,-104.299
+5V on B.Cu "B.Cu-+5V" (solid, remove dead copper, pour order 1): 1.901,-110.623 1.838,-120.402 30.19,-120.466 30.19,-118.18 24.475,-118.18 24.475,-110.519
VREG_OUT on B.Cu "B.Cu-/VREG_OUT" (solid, remove dead copper, pour order 1): -0.629,-104.274 -0.502,-118.625 1.181,-118.625 1.117,-104.305

## Keep-outs
Edge.Cuts:
  lines w0.05: 40.066,33.782 143.51,33.782 ; 40.066,33.782 40.066,64.262 ; 40.066,33.782 143.51,33.782 ; 40.066,33.782 40.066,64.262 ; 40.066,64.262 62.865,64.262 ; 40.066,64.262 62.865,64.262 ; 45.085,98.552 62.865,98.552 ; 45.085,98.552 45.085,155.702 ; 45.085,98.552 62.865,98.552 ; 45.085,98.552 45.085,155.702 ; 45.085,155.702 137.16,155.702 ; 45.085,155.702 137.16,155.702 ; 62.865,64.262 62.865,98.552 ; 62.865,64.262 62.865,98.552 ; 120.015,64.262 120.015,98.552 ; 120.015,64.262 143.51,64.262 ; 120.015,64.262 120.015,98.552 ; 120.015,64.262 143.51,64.262 ; 120.015,98.552 137.16,98.552 ; 120.015,98.552 137.16,98.552 ; 137.16,98.552 137.16,155.702 ; 137.16,98.552 137.16,155.702 ; 143.51,33.782 143.51,64.262 ; 143.51,33.782 143.51,64.262

## Silkscreen, mask and mechanical layers (free items; w line width, h text height)
F.SilkS:
  text "SONAR_LEFT" at 61.745,151.941 h1
  text "SONAR_RIGHT" at 117.714,151.814 h1
  text "REFLECT_LEFT" at 48.973,139.133 h1 r90
  text "REFLECT_RIGHT" at 134.444,138.588 h1 r90
  text "FPGA USER / BUTTON 1" at 126.453,124.344 h1
  text "Homebrew Automation / Romi Adapter Board / Rev. A (190626)" at 84.516,109.073 h2.54
  text "FPGA USER / BUTTON 0" at 126.58,102.499 h1
  text "~WP" at 113.657,64.362 h1
  text "CUT ROMI VREG_SET / BEFORE CONNECTING / THIS BOARD TO BASE!!" at 70.545,62.235 h1
  text "FPGA" at 96.423,60.123 h1 r90
  text "RPI" at 101.623,59.857 h1 r90
  text "ONBOARD / POWER / SELECT" at 89.55,59.488 h1
  text "RPI USER BUTTON" at 133.495,53.564 h1
  text "DEVICE TREE / EEPROM" at 112.035,48.398 h1
  text "5V OFF" at 48.8,47.942 h1 r90
  text "ROMI" at 96.296,47.58 h1 r90
  text "3.3V / POWER / SELECT" at 90.202,47.423 h1
  text "ONBOARD" at 101.376,45.354 h1 r90
  text "RASPBERRY PI" at 111.261,41.626 h1
  text "5V POWER" at 50.784,40.735 h1
  text "FUSE BYPASS" at 71.908,35.657 h1
Dwgs.User:
  drawing of 890 lines, arcs and shapes, not listed